# Altium PCB switch.PcbDoc
Units mm, origin at the board's own origin, x right, y up, seen from the top; angles counter-clockwise.
Board outline 50 x 25 mm, 2 copper layers (Top Layer, Bottom Layer); 23 components, 16 nets, 55 pads, 8 vias.
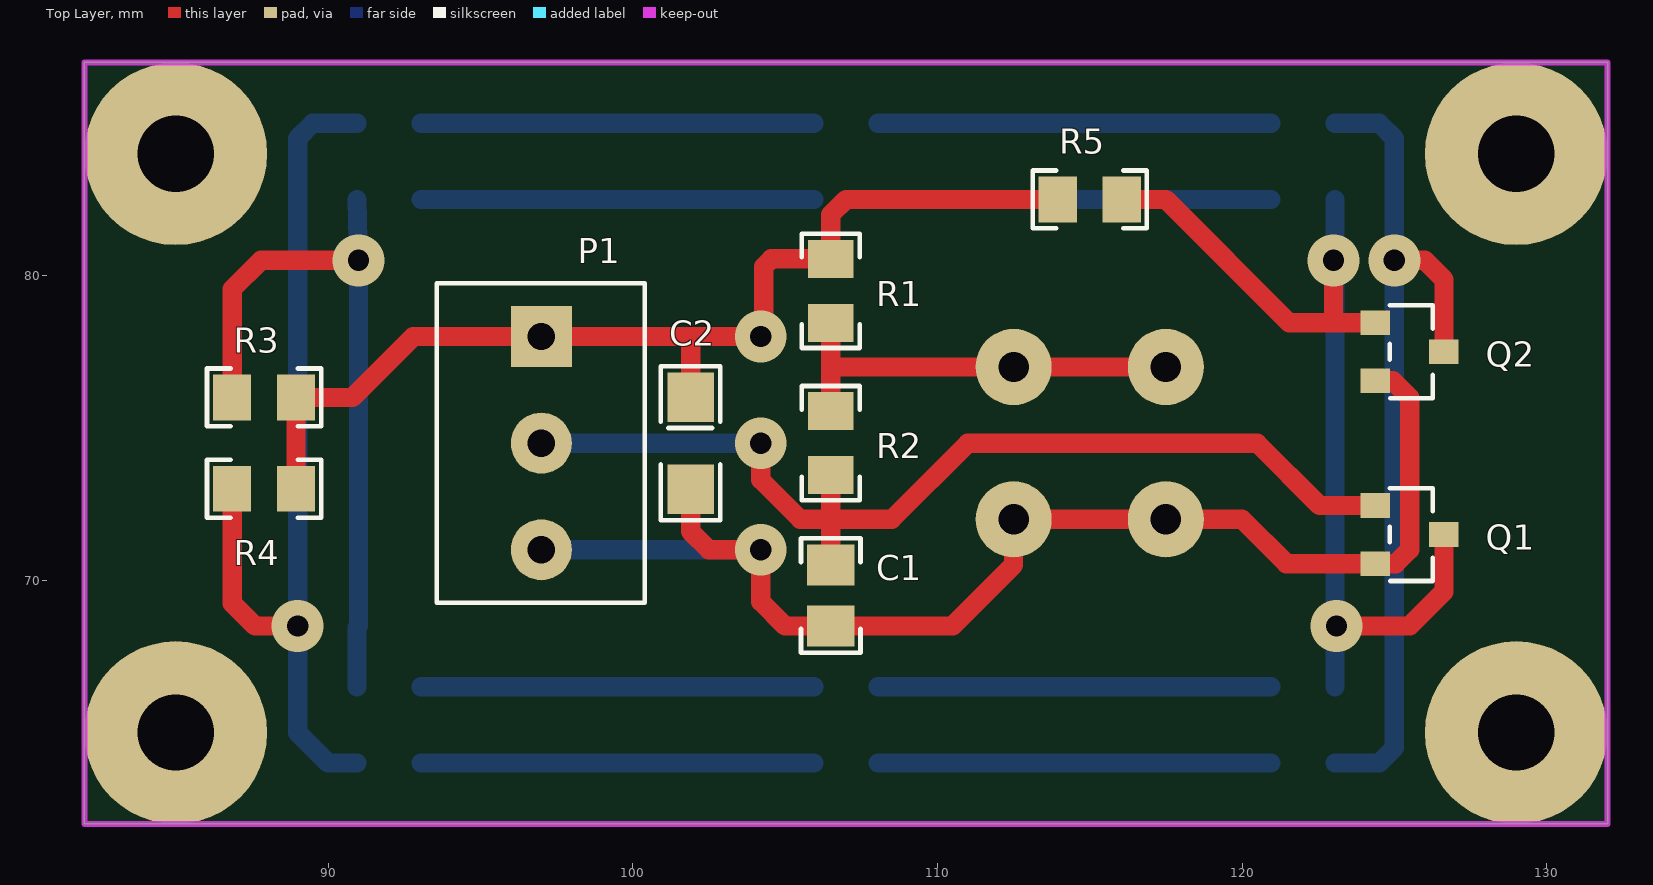
[diagram p0: Top Layer view]
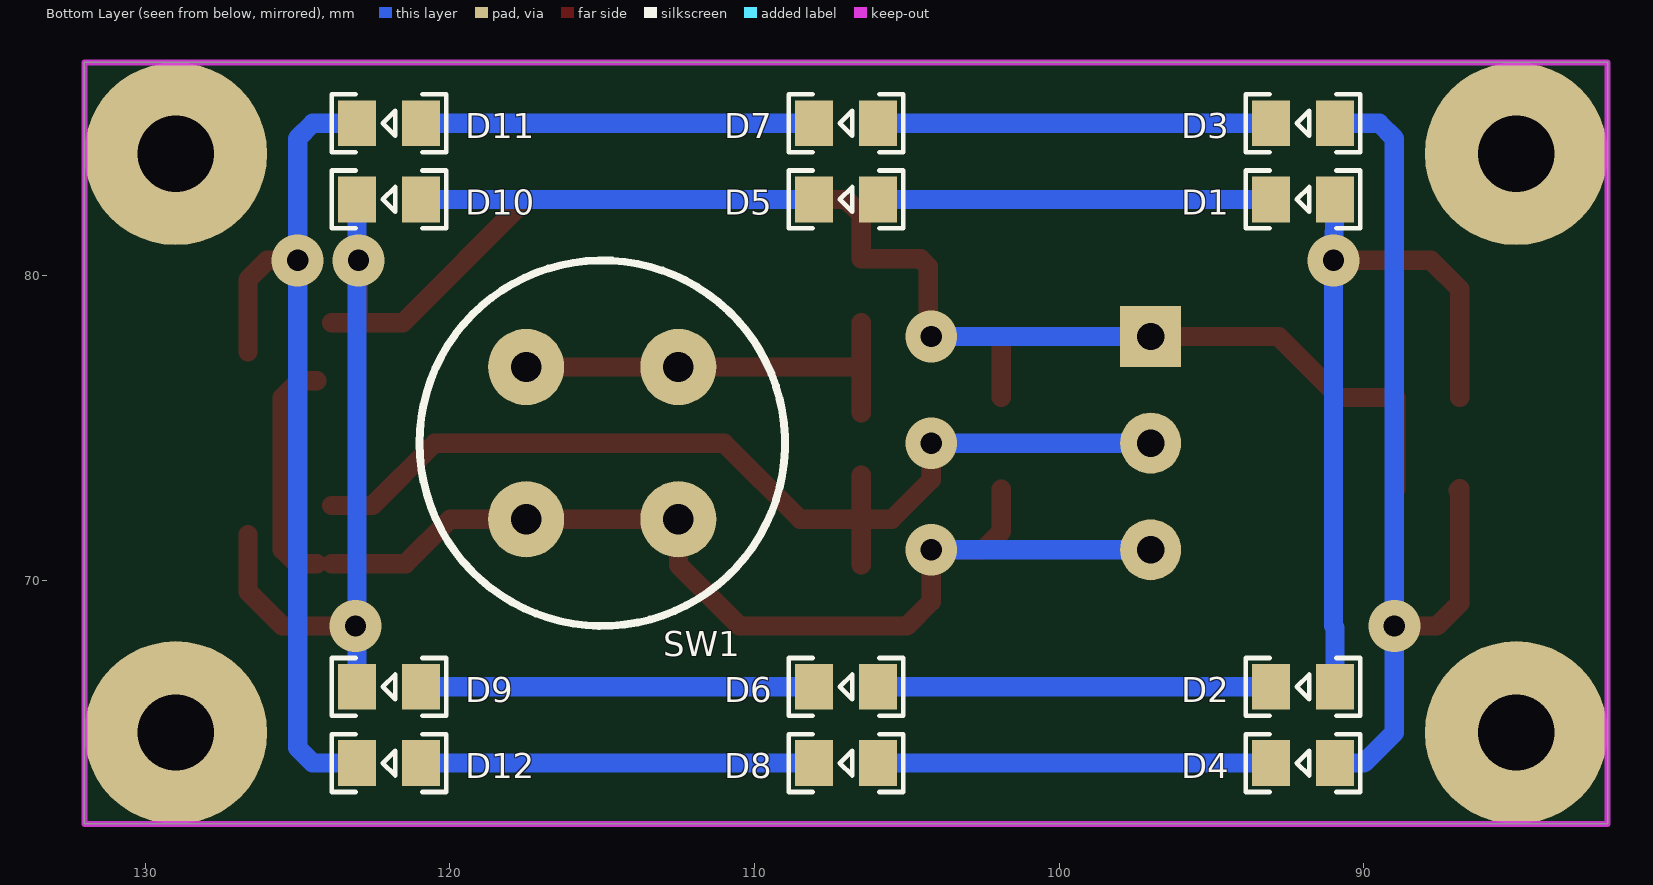
[diagram p1: Bottom Layer view, seen from below]

## Layer stack, top to bottom
Top Layer: signal copper 0.0356
Dielectric: dielectric 0.32, FR-4, Dk 4.8
Bottom Layer: signal copper 0.0356

## Board outline
82,62 132,62 132,87 82,87

## Design rules (kind name [scope] priority, off if disabled: settings)
Clearance [All] p1: gap=0.254
PolygonConnect [All] p1: connectstyle=Relief reliefconductorwidth=0.254 reliefentries=4 polygonreliefangle="90 Angle" airgapwidth=0.254
RoutingVias [All] p1: holewidth=0.7 width=1.6 viastyle="Through Hole" minholewidth=0.7 minwidth=1.6 maxholewidth=0.7 maxwidth=1.6
SolderMaskExpansion [All] p1: expansion=0.102
Width [All] p1: maxlimit=0.635 minlimit=0.508 preferedwidth=0.635 minimp=50.000000 maximp=50.000000 favimp=50.000000
28 further rules are at their usual default settings.

## Components (designator, comment, footprint, x,y, rotation, side; value= is the part's Value field where it differs from the comment)
C1 "100nF" C0805 106.5,69.5 r270 top
C2 "1uF" TANC_A 101.9,74.5 r270 top
D1 "BLUE" LED0805 92,82.5 r180 bottom
D2 "BLUE" LED0805 92,66.5 r180 bottom
D3 "RED" LED0805 92,85 r180 bottom
D4 "RED" LED0805 92,64 r180 bottom
D5 "BLUE" LED0805 107,82.5 r180 bottom
D6 "BLUE" LED0805 107,66.5 r180 bottom
D7 "RED" LED0805 107,85 r180 bottom
D8 "RED" LED0805 107,64 r180 bottom
D9 "BLUE" LED0805 122,66.5 r180 bottom
D10 "BLUE" LED0805 122,82.5 r180 bottom
D11 "RED" LED0805 122,85 r180 bottom
D12 "RED" LED0805 122,64 r180 bottom
P1 "ARK 3-Pin" ARK-3.5mm-3pin 97,78 r270 top
Q1 "2N7002" SOT23 125.5,71.5 r270 top
Q2 "2N7002" SOT23 125.5,77.5 r270 top
R1 "10K" R0805 106.5,79.5 r90 top
R2 "220K" R0805 106.5,74.5 r270 top
R3 "100R" R0805 87.9,76 r0 top
R4 "150R" R0805 87.9,73 r0 top
R5 "220K" R0805 115,82.5 r180 top
SW1 "KS01-BV-BLUE" KS01-B 115,74.5 r90 bottom

## Footprints (in the part's own frame and the unit in brackets; to place one, negate y for a bottom-side part, rotate by r counter-clockwise, add the part's x,y. Pads: shape width x height; smd on the part's side, far side on the other; paste and mask are expansions set on the pad)
ARK-3.5mm-3pin [mm]
  rect 2x2 hole 0.9: 1(0,0)
  round 2 hole 0.9: 2(3.5,0) 3(7,0)
  silkscreen extent -1.75,-3.43 8.73,3.4, body extent -1.76,-3.43 8.74,3.47, height 2.1
C0805 [mm] "Chip Capacitor, Body 2.0x1.2mm, Height 1.3mm, IPC Low Density"
  rect 1.35x1.55 smd: 1(-1,0) 2(1,0)
  silkscreen extent -1.88,-0.97 1.88,0.97, body extent -1.1,-0.72 1.1,0.72, height 1.3
KS01-B [mm]
  round 2.5 hole 1: 1(-2.5,-2.5) 1(-2.5,2.5) 2(2.5,-2.5) 2(2.5,2.5)
  silkscreen extent -6,-6 6,6, body extent -6,-5.99 5.95,5.99, height 12.8
LED0805 [mm] "Chip Diode Led, Body 2.0x1.3mm, IPC Low Density"
  rect 1.25x1.5 smd: 1(-1.05,0) 2(1.05,0)
  silkscreen extent -1.88,-0.95 1.88,0.95, body extent -1.1,-0.67 1.1,0.68, height 0.7
R0805 [mm] "Chip Resistor, Body 2.0x1.3mm, IPC Low Density"
  rect 1.25x1.5 smd: 1(-1.05,0) 2(1.05,0)
  silkscreen extent -1.88,-0.95 1.88,0.95, body extent -1.1,-0.67 1.1,0.67, height 0.7
SOT23 [mil]
  rect 32x38 smd: 1(-37.6,-44.33) 2(37.6,-44.33) 3(0,44.33)
  silkscreen extent -60,-26 60,30, body extent -57,-49 57,48, height 40
TANC_A [mil]
  rect 64x60 smd: 1(-59.53,0) 2(59.53,0)
  silkscreen extent -99,-38 99,38, body extent -64,-31 64,31, height 63

## Part data
C1: library part Cap, "Capacitor"
C2: library part Cap_Pol, "Capacitor Polarized"
D1 D2 D5 D6 D9 D10: library part LED_BLUE, "LED"
D3 D4 D7 D8 D11 D12: library part LED_RED, "LED"
Q1 Q2: library part 2N7002(GSD), "N-MOSFET"
R1 R2 R3 R4 R5: library part Res, "Resistor"
SW1: library part KS01, "Pozycje:2; SPST-NO; 0,01A/35VDC; 1,3N"

## Free pads (board coordinates)
  round 6 hole 2.5: M(85,65) M(85,84) M(129,65) M(129,84)

## Via types
v1: diameter 1.7, hole 0.7, Top Layer to Bottom Layer, 8 vias

## Nets (pads, with @x,y where several pads share a name; then routed paths per layer and width w, separated by ;. In a path a pad name is that pad's centre, name@x,y a point inside that pad or via, vN(x,y) a via of type N, cw(c..) or ccw(c..) an arc to the next point about the centre after c; other vN are vias at no path point)
12V: C2.1 P1.1 R1.2 R3.2 R4.2 R5.2 | length 41.9
  Top Layer w0.635: R4.2 R3.2 90.8,76 92.8,78 P1.1 101.9,78 ; C2.1 101.9,78 ; R5.2 107,82.5 106.5,82 R1.2 104.55,80.55 104.3,80.3 104.3,78 v1(104.2,78) 101.9,78
  Bottom Layer w0.635: P1.1 v1@104,78
GND: C1.2 C2.2 P1.3 Q1.2 Q2.2 SW1.1 | length 43.2
  Top Layer w0.635: C2.2 101.9,71.6 102.5,71 v1(104.2,71) 104.2,69.3 105,68.5 C1.2 110.5,68.5 112.5,70.5 112.5,72 117.5,72 120,72 121.455,70.545 123.874,70.545 ; Q1.2 125.045,70.545 125.5,71 125.5,76 124.955,76.545 Q2.2
  Bottom Layer w0.635: P1.3 v1@104,71
NetD1_1: D1.1 D5.2 | length 12.9
  Bottom Layer w0.635: D1.1 D5.2
NetD1_2: D1.2 D2.2 R3.1 | length 24.1
  Top Layer w0.635: R3.1 86.85,79.55 87.8,80.5 v1(91,80.5)
  Bottom Layer w0.635: D2.2 90.95,68.45 91,68.5 v1(91,80.5) D1.2
NetD2_1: D2.1 D6.2 | length 12.9
  Bottom Layer w0.635: D2.1 D6.2
NetD3_1: D3.1 D7.2 | length 12.9
  Bottom Layer w0.635: D3.1 D7.2
NetD3_2: D3.2 D4.2 R4.1 | length 30.3
  Top Layer w0.635: R4.1@86.9,72.95 R4.1 86.85,69.25 87.6,68.5 v1(89,68.5)
  Bottom Layer w0.635: D4.2 90,64 89,65 v1(89,68.5) 89,84.5 89.5,85 D3.2
NetD4_1: D4.1 D8.2 | length 12.9
  Bottom Layer w0.635: D4.1 D8.2
NetD5_1: D5.1 D10.2 | length 12.9
  Bottom Layer w0.635: D5.1 D10.2
NetD6_1: D6.1 D9.2 | length 12.9
  Bottom Layer w0.635: D6.1 D9.2
NetD7_1: D7.1 D11.2 | length 12.9
  Bottom Layer w0.635: D7.1 D11.2
NetD8_1: D8.1 D12.2 | length 12.9
  Bottom Layer w0.635: D8.1 D12.2
NetD9_1: D9.1 D10.1 Q1.3 Q2.1 R5.1 | length 33.4
  Top Layer w0.635: R5.1 117.5,82.5 121.545,78.455 123,78.455 ; v1(123,80.5) 123,78.455 ; v1(123.1,68.5) 125.5,68.5 126.626,69.626 Q1.3 ; 123.874,78.455 123,78.455
  Bottom Layer w0.635: D9.1 D10.1
NetD11_1: D11.1 D12.1 Q2.3 | length 28.6
  Top Layer w0.635: v1(125,80.5) 126,80.5 126.626,79.874 Q2.3
  Bottom Layer w0.635: D12.1 124.5,64 125,64.5 v1(125,80.5) 125,84.5 124.5,85 D11.1
NetR1_1: R1.1 R2.1 SW1.2 | length 14
  Top Layer w0.635: R2.1@106.5,75.5 R2.1 106.5,77 ; R1.1 106.5,77 ; SW1.2@117.5,77 112.5,77 111.5,77 106.5,77
OUT: C1.1 P1.2 Q1.1 R2.2 | length 33.3
  Top Layer w0.635: v1@104,74.5 104.2,74.3 104.2,73.3 105.5,72 106.5,72 ; C1.1 106.5,72 ; R2.2 106.5,72 ; 123.874,72.455 122.545,72.455 120.5,74.5 111,74.5 108.5,72 106.5,72
  Bottom Layer w0.635: P1.2 v1@104,74.5
  other v1: 104.2,74.5

## Keep-outs
Keep-Out Layer:
  the board outline again, w0.2